# Altium PCB DRV8874 MOTOR DRV.PcbDoc
Units mil, origin at the board's own origin, x right, y up, seen from the top; angles counter-clockwise.
Board outline 1397.64 x 3157.48 mil, 2 copper layers (Top Layer, Bottom Layer); 34 components, 32 nets, 112 pads, 78 vias.
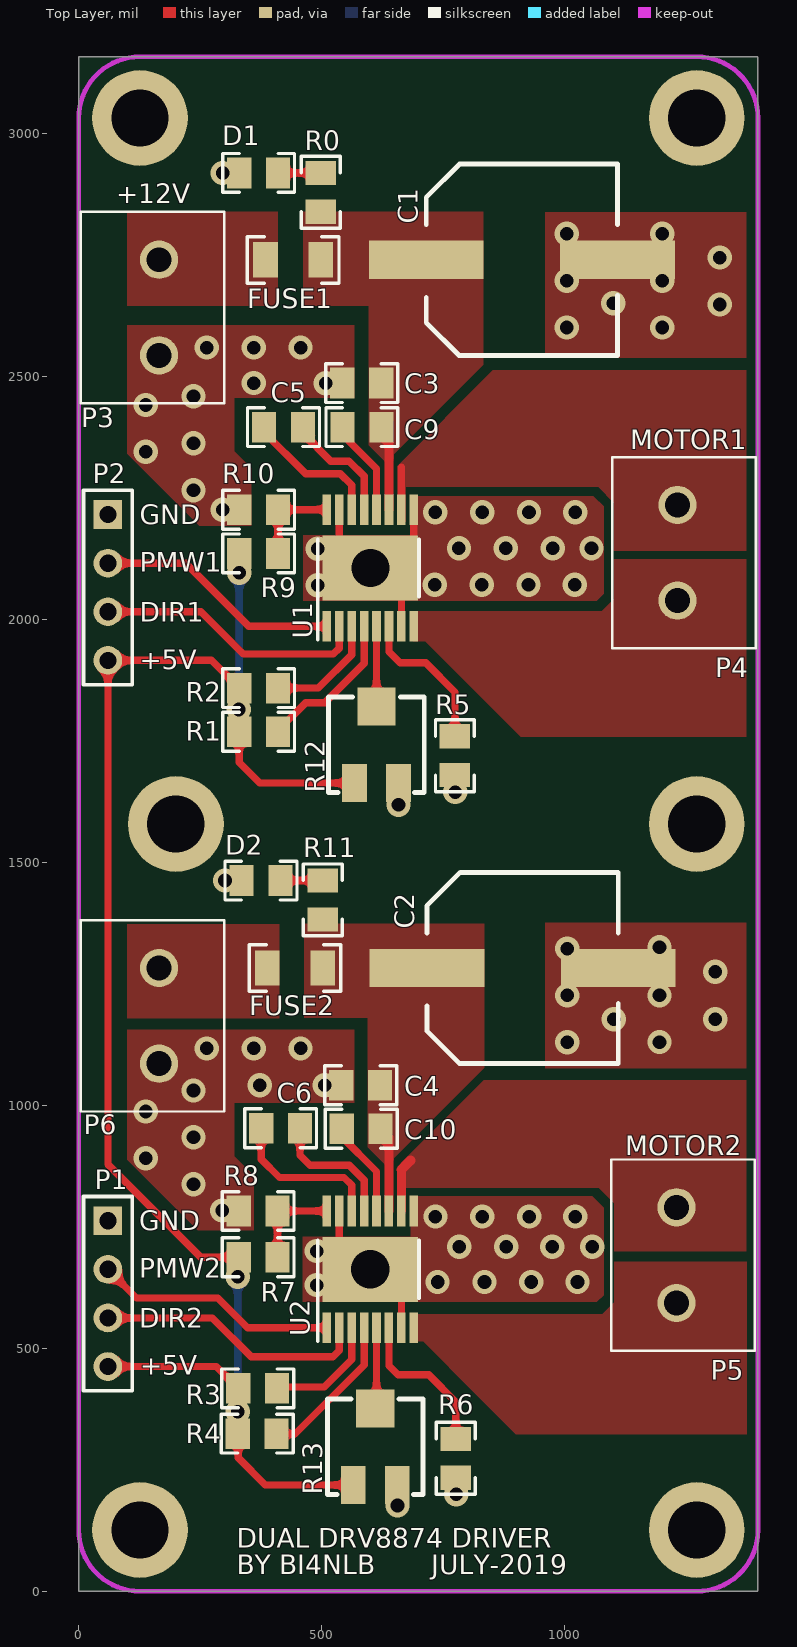
[diagram p0: Top Layer view]
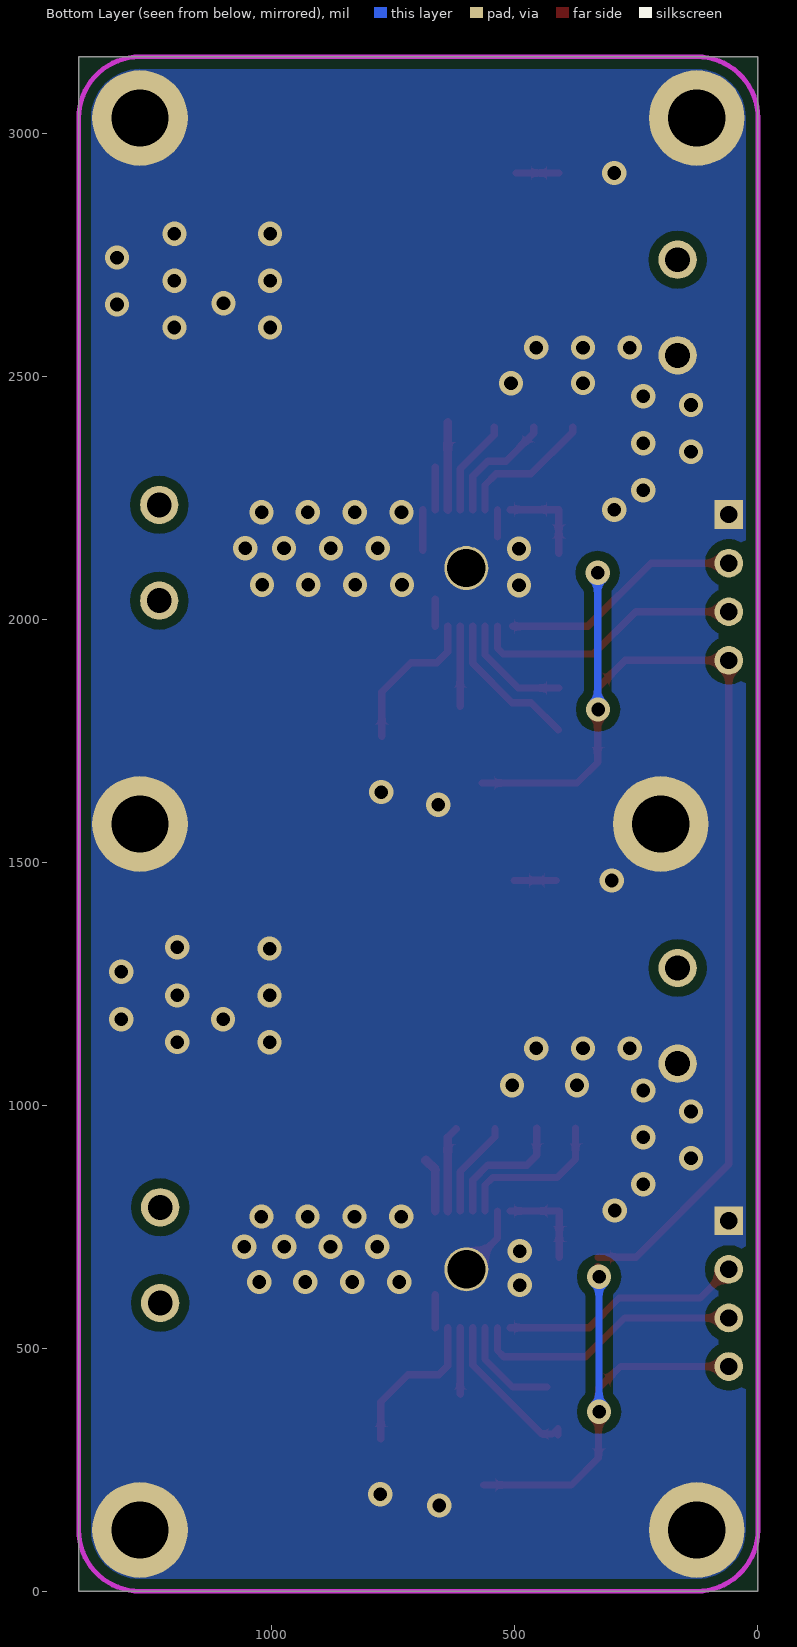
[diagram p1: Bottom Layer view, seen from below]

## Layer stack, top to bottom
Top Solder: solder mask 0.4, Solder Resist, Dk 3.5
Top Layer: signal copper 1.4
Dielectric 1: dielectric 12.6, FR-4, Dk 4.8
Bottom Layer: signal copper 1.4
Bottom Solder: solder mask 0.4, Solder Resist, Dk 3.5

## Board outline
0,0 0,3157.48 1397.64,3157.48 1397.64,0 0,0

## Design rules (kind name [scope] priority, off if disabled: settings)
Clearance [All] p1: gap=20 ignorepadtopadclearanceinfootprint=FALSE
ComponentClearance [All] p1: gap=0 collisioncheckmode=3 verticalgap=0 showdistances=FALSE
Height [All] p1: minheight=0 maxheight=3937.01 prefheight=500
HoleSize [All] p1: absolutevalues=TRUE maxlimit=200 minlimit=1 maxpercent=80.000 minpercent=20.000
HoleToHoleClearance [All] p1: gap=0 allowstackedmicrovias=TRUE
MinimumSolderMaskSliver [All] p1: minsoldermaskwidth=0
PlaneClearance [All] p1: clearance=0
PlaneConnect [All] p1: planeconnectstyle=Direct reliefexpansion=100 reliefentries=4 reliefconductorwidth=100 reliefairgap=0
PolygonConnect [All] p1: connectstyle=Direct reliefconductorwidth=100 reliefentries=4 polygonreliefangle="90 Angle" airgapwidth=0
RoutingVias [All] p1: holewidth=28 width=50 viastyle="Through Hole" minholewidth=10 minwidth=20 maxholewidth=28 maxwidth=50
SilkToSilkClearance [All] p1: silktosilkclearance=0
SilkToSolderMaskClearance [IsPad] p1: minsilkscreentomaskgap=0 clearancetoexposedcopper=TRUE
SolderMaskExpansion [All] p1: expansion=4
Width [All] p1: maxlimit=100 minlimit=10 preferedwidth=10 minimp=50.000000 maximp=50.000000 favimp=50.000000
21 further rules are at their usual default settings.

## Components (designator, comment, footprint, x,y, rotation, side; value= is the part's Value field where it differs from the comment)
C1 "470uF" CAP 1108.7,2936.73 r270 top
C2 "470uF" CAP 1110,1479.28 r270 top
C3 "08051C103JAT2A" 0805_HV 582.23,2486.04 r180 top value=0.01uF
C4 "08051C103JAT2A" 0805_HV 580,1041.43 r180 top value=0.01uF
C5 "08051C103JAT2A" 0805_HV 421.31,2395.43 r0 top value=0.01uF
C6 "08051C103JAT2A" 0805_HV 415.32,952.43 r0 top value=0.01uF
C9 "08051C103JAT2A" 0805_HV 582.8,2395.43 r180 top value=0.01uF
C10 "08051C103JAT2A" 0805_HV 581,951.43 r180 top value=0.01uF
D1 "RED" 0805_HV 370,2918.31 r180 top
D2 "RED" 0805_HV 375,1462.43 r180 top
FUSE1 "" 1206 441,2739.43 r0 top
FUSE2 "" 1206 445,1282.43 r0 top
P1 "Header 4" HDR1X4 60,762.43 r270 top
P2 "Header 4" HDR1X4 60,2215.43 r270 top
P3 "Used in BOM report" 2p 3.94,2838.31 r270 top
P4 "Header 2" 2p 1393.42,1940.01 r90 top
P5 "Header 2" 2p 1391.42,494.72 r90 top
P6 "Used in BOM report" 2p 3.94,1380.86 r270 top
R0 "CRCW080510K0FKEA" 0805_HV 498.09,2878.31 r90 top value=10.0k
R1 "CRCW080510K0FKEA" 0805_HV 370,1768.43 r180 top value=10.0k
R2 "CRCW080510K0FKEA" 0805_HV 370,1858.43 r180 top value=10.0k
R3 "CRCW080510K0FKEA" 0805_HV 368,417.43 r180 top value=10.0k
R4 "CRCW080510K0FKEA" 0805_HV 367,324.43 r180 top value=10.0k
R5 "CRCW080510K0FKEA" 0805_HV 774,1719.43 r270 top value=10.0k
R6 "CRCW080510K0FKEA" 0805_HV 776,273.43 r270 top value=10.0k
R7 "CRCW080510K0FKEA" 0805_HV 369,687.43 r180 top value=10.0k
R8 "CRCW080510K0FKEA" 0805_HV 369,782.43 r180 top value=10.0k
R9 "CRCW080510K0FKEA" 0805_HV 370,2135.43 r0 top value=10.0k
R10 "CRCW080510K0FKEA" 0805_HV 370,2225.43 r180 top value=10.0k
R11 "CRCW080510K0FKEA" 0805_HV 502.09,1422.43 r90 top value=10.0k
R12 "50K" POT4MM-2 612.5,1741.69 r90 top
R13 "50K" POT4MM-2 610,297.43 r90 top
U1 "DRV8874PWPR" PWP0016J_M 600,2105.43 r90 top value=Value
U2 "DRV8874PWPR" PWP0016J_M 599.9,662.43 r90 top value=Value

## Footprints (in the part's own frame and the unit in brackets; to place one, negate y for a bottom-side part, rotate by r counter-clockwise, add the part's x,y. Pads: shape width x height; smd on the part's side, far side on the other; paste and mask are expansions set on the pad)
2p [mm]
  round 2 hole 1.3: 1(2.5,4.1) 2(7.5,4.1)
  silkscreen extent 0,0 10,7.5
0805_HV [mil] "0805 with 30mil clearance between pads"
  rect 50x63 smd: 1(-40,0) 2(40,0)
  silkscreen extent -74,-40 74,40, body extent -43,-29 43,29, height 57
1206 [mm] "1206 from SM-752 data"
  rect 1.3x1.85 smd: 1(-1.45,0) 2(1.45,0)
  silkscreen extent -2.4,-1.21 2.4,1.21, body extent -1.7,-0.9 1.7,0.9, height 1.35
CAP [mm]
  rect 2x6 smd: 1(5,0) 2(5,-10)
  silkscreen extent 0,-10 10,0
HDR1X4 [mm] "Connector; Header; 4 Position"
  rect 1.5x1.5 hole 0.9: 1(0,0)
  round 1.5 hole 0.9: 2(2.54,0) 3(5.08,0) 4(7.62,0)
  silkscreen extent -1.27,-1.27 8.89,1.27
POT4MM-2 [mm] "Square Trimming Potentiometer"
  rect 2x1.3 smd: CCW(-2,-1.15) CW(-2,1.15)
  rect 2x2 smd: W(2,0)
  silkscreen extent -2.5,-2.5 2.5,2.5
PWP0016J_M [mm]
  rect 1.6x0.45 smd paste+0 mask+0.051: 1(-3.05,2.275) 2(-3.05,1.625) 3(-3.05,0.975) 4(-3.05,0.325) 5(-3.05,-0.325) 6(-3.05,-0.975) 7(-3.05,-1.625) 8(-3.05,-2.275) 9(3.05,-2.275) 10(3.05,-1.625) 11(3.05,-0.975) 12(3.05,-0.325) 13(3.05,0.325) 14(3.05,0.975) 15(3.05,1.625) 16(3.05,2.275)
  rect 3.4x5 smd paste-1.7 mask-1.702: 17(0,0)
  silkscreen extent -3.75,-2.55 1.5,2.75, body extent 0,0 0.25,0.25, height 0.25

## Part data
C1 C2: library part Cap_100uF, Alternate Manufacturer=-, Manufacturer="Used in BOM report", Alternate PartNumber=-, ComponentLink1Description="Datasheet Link", CompType="Used in some BOM reports.  Useful for finding later.", MountType="SMT, TH, or N/A", PackageReference="eg:  0603, used in PnP report", PartNumber="Used in BOM report", RoHS="Used in BOM report.  Use Y or N."
C3 C4 C9 C10: "CAP, CERM, 0.01 礔, 100 V, +/- 5%, X7R, 0805", Cap_Case=0805, Manufacturer=AVX, Supplier Part Number 1=478-3745-1-ND, TempCo=X7R, Tolerance_%=5, Value1="0.078 ohm", Value2=100V, ValueDisplayed=0.1礔, AEC Category=Q200, AEC Grade=N/A, AEC Qualified=N, Cap_F=0.00000001, ComponentLink1Description="Datasheet link", ComponentLink1URL=http://datasheets.avx.com/X7RDielectric.pdf, CompType=Capacitor, ESR_ohm=0.078, LatestRevisionDate=2016-08-09, MountType=SMT, PackageReference=0805, PartNumber=08051C103JAT2A, Polarized=N, Published=2008-06-19, Publisher="Texas Instruments", RoHS=Y, SizeArea_mm2=2.5, SizeAreaWB_mm2=6.75, SizeX_mm=2, SizeY_mm=1.25, SizeZ_mm=1.45, Supplier 1=Digi-Key, Supplier 2=Mouser, Supplier 3=Farnell, Supplier Part Number 2=581-08051C103J, Supplier Part Number 3=1396066, SymbolVersion=2008-07-09, TaMax_C=125, TaMin_C=-55, Technology=Ceramic, U/M=EA, VDC_V=100
C5: "CAP, CERM, 0.01 礔, 100 V, +/- 5%, X7R, 0805", Cap_Case=0805, Manufacturer=AVX, Supplier Part Number 1=478-3745-1-ND, TempCo=X7R, Tolerance_%=5, Value1="0.078 ohm", Value2=100V, ValueDisplayed=0.022礔, AEC Category=Q200, AEC Grade=N/A, AEC Qualified=N, Cap_F=0.00000001, ComponentLink1Description="Datasheet link", ComponentLink1URL=http://datasheets.avx.com/X7RDielectric.pdf, CompType=Capacitor, ESR_ohm=0.078, LatestRevisionDate=2016-08-09, MountType=SMT, PackageReference=0805, PartNumber=08051C103JAT2A, Polarized=N, Published=2008-06-19, Publisher="Texas Instruments", RoHS=Y, SizeArea_mm2=2.5, SizeAreaWB_mm2=6.75, SizeX_mm=2, SizeY_mm=1.25, SizeZ_mm=1.45, Supplier 1=Digi-Key, Supplier 2=Mouser, Supplier 3=Farnell, Supplier Part Number 2=581-08051C103J, Supplier Part Number 3=1396066, SymbolVersion=2008-07-09, TaMax_C=125, TaMin_C=-55, Technology=Ceramic, U/M=EA, VDC_V=100
C6: "CAP, CERM, 0.01 礔, 100 V, +/- 5%, X7R, 0805", Cap_Case=0805, Manufacturer=AVX, Supplier Part Number 1=478-3745-1-ND, TempCo=X7R, Tolerance_%=5, Value1="0.078 ohm", Value2=100V, ValueDisplayed=0.01礔, AEC Category=Q200, AEC Grade=N/A, AEC Qualified=N, Cap_F=0.00000001, ComponentLink1Description="Datasheet link", ComponentLink1URL=http://datasheets.avx.com/X7RDielectric.pdf, CompType=Capacitor, ESR_ohm=0.078, LatestRevisionDate=2016-08-09, MountType=SMT, PackageReference=0805, PartNumber=08051C103JAT2A, Polarized=N, Published=2008-06-19, Publisher="Texas Instruments", RoHS=Y, SizeArea_mm2=2.5, SizeAreaWB_mm2=6.75, SizeX_mm=2, SizeY_mm=1.25, SizeZ_mm=1.45, Supplier 1=Digi-Key, Supplier 2=Mouser, Supplier 3=Farnell, Supplier Part Number 2=581-08051C103J, Supplier Part Number 3=1396066, SymbolVersion=2008-07-09, TaMax_C=125, TaMin_C=-55, Technology=Ceramic, U/M=EA, VDC_V=100
D1 D2: library part LED, "LED发光管"
FUSE1 FUSE2: library part R, "电阻"
P1 P2: "Header, 4-Pin", LatestRevisionDate=17-Jul-2002, LatestRevisionNote="Re-released for DXP Platform.", Publisher="Altium Limited"
P3 P6: library part PWR5.5, Alternate Manufacturer=-, Alternate PartNumber=-, ComponentLink1Description="Datasheet Link", CompType="Used in some BOM reports.  Useful for finding later.", Manufacturer="Used in BOM report", MountType="SMT, TH, or N/A", PackageReference="eg:  0603, used in PnP report", PartNumber="Used in BOM report", RoHS="Used in BOM report.  Use Y or N."
P4 P5: "Header, 2-Pin", LatestRevisionDate=17-Jul-2002, LatestRevisionNote="Re-released for DXP Platform.", Publisher="Altium Limited"
R0 R11: "RES, 10.0 k, 1%, 0.125 W, 0805", Manufacturer=Vishay-Dale, Power_W=0.125, Supplier Part Number 1=541-10.0KCCT-ND, TempCo="100 ppm/C", Tolerance_%=1, Value1=1%, Value2=0.125W, Value_Code=10k0, ValueDisplayed=10.0k, AEC Category=Q200, AEC Qualified=?, ComponentLink1Description="Datasheet link", ComponentLink1URL=http://www.vishay.com/docs/20035/dcrcwe3.pdf, CompType=Resistor, EIA_Code=E96, LatestRevisionDate=2016-08-02, MountType=SMT, PackageReference=0805, PartNumber=CRCW080510K0FKEA, Published=2008-06-26, Publisher="Texas Instruments", Res_ohm=10000, RoHS=Y, SizeArea_mm2=2.5, SizeX_mm=2, SizeY_mm=1.25, SizeZ_mm=1.45, Supplier 1=Digi-Key, Supplier 2=Mouser, Supplier 3=Farnell, Supplier Part Number 2=71-CRCW0805-10K-E3, Supplier Part Number 3=1469856, SymbolVersion=2009-05-29, Technology="Thick Film", U/M=EA, VDC_V=150
R1 R2 R3 R4: "RES, 10.0 k, 1%, 0.125 W, 0805", Manufacturer=Vishay-Dale, Power_W=0.125, Supplier Part Number 1=541-10.0KCCT-ND, TempCo="100 ppm/C", Tolerance_%=1, Value1=1%, Value2=0.125W, Value_Code=10k0, ValueDisplayed=10k, AEC Category=Q200, AEC Qualified=?, ComponentLink1Description="Datasheet link", ComponentLink1URL=http://www.vishay.com/docs/20035/dcrcwe3.pdf, CompType=Resistor, EIA_Code=E96, LatestRevisionDate=2016-08-02, MountType=SMT, PackageReference=0805, PartNumber=CRCW080510K0FKEA, Published=2008-06-26, Publisher="Texas Instruments", Res_ohm=10000, RoHS=Y, SizeArea_mm2=2.5, SizeX_mm=2, SizeY_mm=1.25, SizeZ_mm=1.45, Supplier 1=Digi-Key, Supplier 2=Mouser, Supplier 3=Farnell, Supplier Part Number 2=71-CRCW0805-10K-E3, Supplier Part Number 3=1469856, SymbolVersion=2009-05-29, Technology="Thick Film", U/M=EA, VDC_V=150
R5 R6: "RES, 10.0 k, 1%, 0.125 W, 0805", Manufacturer=Vishay-Dale, Power_W=0.125, Supplier Part Number 1=541-10.0KCCT-ND, TempCo="100 ppm/C", Tolerance_%=1, Value1=1%, Value2=0.125W, Value_Code=10k0, ValueDisplayed=1.5k, AEC Category=Q200, AEC Qualified=?, ComponentLink1Description="Datasheet link", ComponentLink1URL=http://www.vishay.com/docs/20035/dcrcwe3.pdf, CompType=Resistor, EIA_Code=E96, LatestRevisionDate=2016-08-02, MountType=SMT, PackageReference=0805, PartNumber=CRCW080510K0FKEA, Published=2008-06-26, Publisher="Texas Instruments", Res_ohm=10000, RoHS=Y, SizeArea_mm2=2.5, SizeX_mm=2, SizeY_mm=1.25, SizeZ_mm=1.45, Supplier 1=Digi-Key, Supplier 2=Mouser, Supplier 3=Farnell, Supplier Part Number 2=71-CRCW0805-10K-E3, Supplier Part Number 3=1469856, SymbolVersion=2009-05-29, Technology="Thick Film", U/M=EA, VDC_V=150
R7 R8 R9 R10: "RES, 10.0 k, 1%, 0.125 W, 0805", Manufacturer=Vishay-Dale, Power_W=0.125, Supplier Part Number 1=541-10.0KCCT-ND, TempCo="100 ppm/C", Tolerance_%=1, Value1=1%, Value2=0.125W, Value_Code=10k0, ValueDisplayed=0, AEC Category=Q200, AEC Qualified=?, ComponentLink1Description="Datasheet link", ComponentLink1URL=http://www.vishay.com/docs/20035/dcrcwe3.pdf, CompType=Resistor, EIA_Code=E96, LatestRevisionDate=2016-08-02, MountType=SMT, PackageReference=0805, PartNumber=CRCW080510K0FKEA, Published=2008-06-26, Publisher="Texas Instruments", Res_ohm=10000, RoHS=Y, SizeArea_mm2=2.5, SizeX_mm=2, SizeY_mm=1.25, SizeZ_mm=1.45, Supplier 1=Digi-Key, Supplier 2=Mouser, Supplier 3=Farnell, Supplier Part Number 2=71-CRCW0805-10K-E3, Supplier Part Number 3=1469856, SymbolVersion=2009-05-29, Technology="Thick Film", U/M=EA, VDC_V=150
R12 R13: library part "RPot SM", "Square Trimming Potentiometer", ComponentLink1Description="Manufacturer Link", ComponentLink1URL=http://bourns.com/2/search.html, DatasheetVersion=Oct-2003, PackageDescription="Square Trimming Potentiometer", PackageReference=POT4MM-2, Published=17-Dec-2003, Publisher="Altium Limited"
U1 U2: "Imported", Manufacturer="Texas Instruments", PartNumber=DRV8874PWPR, RefDes=RefDes, TYPE=TYPE

## Free pads (board coordinates)
  round 196.85 hole 118.11: 1(125.98,3031.5) 1(125.98,125.98) 1(200,1578.74) 1(1271.65,125.98) 1(1271.65,1578.74) 1(1271.65,3031.5)
  round 90.55 hole 78.74: 1(600,662.43) 1(600.1,2105.43)

## Via types
v1: diameter 50, hole 28, Top Layer to Bottom Layer, 78 vias

## Nets (pads, with @x,y where several pads share a name; then routed paths per layer and width w, separated by ;. In a path a pad name is that pad's centre, name@x,y a point inside that pad or via, vN(x,y) a via of type N, cw(c..) or ccw(c..) an arc to the next point about the centre after c; other vN are vias at no path point)
+5V: P1.4 P2.4 R1.2 R2.2 R3.2 R4.2 R7.2 R9.1 R12.CW R13.CW | length 3360.2
  Top Layer w15: P1.4 283,462.43 R3.2 328,274.43 383.74,218.69 R13.CW ; v1(327,647.43) 327,654.43 331,658.43 326,663.43 R7.2@330,667.43 ; R7.2 251,687.43 60,878.43 P2.4 273,1915.43 R2.2 R1.2 330,1705.43 372.48,1662.95 R12.CW
  Bottom Layer w15: v1@326,645.43 327,644.43 v1(327,369.43) ; v1(327,647.43) v1@328,647.43 ; v1(329,1814.43) 330,1815.43 v1(330,2095.43)
+12V: C1.2 C3.1 C9.1 FUSE1.2 R0.1 U1.11 | length 179.5
  Top Layer w18: U1.11 C9.1@638.39,2405
+12V_1: C2.2 C4.1 C10.1 FUSE2.2 R11.1 U2.11 | length 176.1
  Top Layer w15: C10.1 C10.1@638.39,934.05
  Top Layer w18: U2.11@638.39,782.51 C10.1@638.39,934.05
DIR1: P2.3 U1.2 | length 561.8
  Top Layer w15: P2.3 251.74,2015.43 338.66,1928.51 524,1928.51 536.02,1940.54 U1.2
DIR2: P1.3 U2.2 | length 561.5
  Top Layer w15: P1.3 274.74,562.43 354.74,482.43 523,482.43 536.02,495.46 U2.2@536.02,542.35
GND: C1.1 C2.1 C3.2 C4.2 D1.2 D2.2 P1.1 P2.1 P3.2 P6.2 pad.1 R5.2 R6.2 R8.2 R10.2 R12.CCW R13.CCW U1.7 U1.9 U1.15 U1.17 U2.7 U2.9 U2.15 U2.17 | length 410.7
  Top Layer w15: U2.15@536.02,782.51 536.02,726.41 U2.17@600,662.43 ; U1.17@536.02,2169.41 U1.15 ; U2.7@663.98,542.35 U2.17@663.98,610.24 ; U1.7 U1.17@663.98,2041.46 ; U1.17@689.57,2141.43 U1.9
  other v1: 656,176.43 777,199.43 490,630 738.39,636.3 834.83,636.3 931.26,636.3 1026.24,636.3 490,700 783.12,708.66 879.55,708.66 974.53,708.66 1056.85,708.66 733.88,770.93 830.32,770.93 926.76,770.93 1021.73,770.93 295,783.43 236.22,837.61 137.8,890.72 236.22,934.05 137.8,987.16 236.22,1030.49 372.48,1041.43 506,1041.43 263.56,1116.93 360,1116.93 456.44,1116.93 1005,1129.56 1195,1130 1100.64,1176.9 1310,1176.9 1005,1226 1195,1226 1310,1275 1005,1322.43 1195,1325 301,1462.43 658,1618.43 775,1644.43 491.73,2070 732.57,2071.06 829,2071.06 925.44,2071.06 1020.42,2071.06 491.73,2145 1055,2146 782.32,2146.06 878.76,2146.06 975.2,2146.06 733.57,2220.06 830,2220.06 926.44,2220.06 1021.42,2220.06 296,2225.43 236.22,2265.77 137.8,2344.51 236.22,2362.2 137.8,2440.94 236.22,2458.64 508.23,2485.43 360,2486.04 263.56,2559.06 360,2559.06 456.44,2559.06 1003.94,2600.41 1200.79,2600.41 1318.9,2647.76 1099.68,2650.29 1003.94,2696.85 1200.79,2696.85 1318.9,2744.19 1003.94,2793.29 1200.79,2793.29 296,2918.31
NetC5_1: C5.1 U1.14 | length 286.3
  Top Layer w15: C5.1 381.31,2385.12 467,2299.43 538.26,2299.43 561.61,2276.08 U1.14
NetC5_2: C5.2 U1.13 | length 244.1
  Top Layer w15: C5.2 461.31,2382.56 518.43,2325.43 556,2325.43 587.2,2294.23 U1.13
NetC6_1: C6.1 U2.14 | length 325
  Top Layer w15: C6.1 375.31,889.12 413,851.43 546,851.43 561.61,835.82 U2.14@561.61,782.51
NetC6_2: C6.2 U2.13 | length 271.6
  Top Layer w15: C6.2 455.31,897.12 476,876.43 556.36,876.43 587.2,845.58 U2.13@587.2,782.51
NetC9_2: C9.2 U1.12 | length 198.9
  Top Layer w15: C9.2 542.8,2379.64 612.8,2309.64 U1.12
NetC10_2: C10.2 U2.12 | length 198.7
  Top Layer w15: C10.2 541,935.43 612.8,863.64 U2.12@612.8,782.51
NetD1_1: D1.1 R0.2 | length 88.1
  Top Layer w15: D1.1 R0.2
NetD2_1: D2.1 R11.2 | length 87.1
  Top Layer w15: D2.1 R11.2
NetFUSE1_1: FUSE1.1 P3.1
NetFUSE2_1: FUSE2.1 P6.1
NetR1_1: R1.1 U1.4 | length 308.9
  Top Layer w15: R1.1@411,1772.43 467,1828.43 506.23,1828.43 587.2,1909.4 U1.4
NetR2_1: R2.1 U1.3 | length 238.3
  Top Layer w15: R2.1 493,1858.43 561.61,1927.05 U1.3
NetR3_1: R3.1 U2.3 | length 216.4
  Top Layer w15: 434,420.43 505,420.43 561.61,477.05 U2.3@561.61,542.35
NetR4_1: R4.1 U2.4 | length 329.5
  Top Layer w15: R4.1@411.31,321.43 411.31,334.74 422.62,323.43 445,323.43 587.2,465.64 U2.4@587.2,542.35
NetR5_1: R5.1 U1.6 | length 313.1
  Top Layer w15: U1.6 638.39,1933.05 661,1910.43 714,1910.43 774,1850.43 R5.1
NetR6_1: R6.1 U2.6 | length 322.8
  Top Layer w15: U2.6@638.39,542.35 638.39,464.05 657,445.43 720,445.43 776,389.43 R6.1
NetR7_1: R7.1 R8.1 U2.16 | length 195.7
  Top Layer w15: R7.1 R8.1 509.59,782.43 U2.16@509.67,782.51
NetR9_2: R9.2 R10.1 U1.16 | length 190.5
  Top Layer w15: R9.2 R10.1 410.08,2225.51 U1.16
OUT1_1: P4.1 U1.8
OUT1_2: P4.2 U1.10 | length 87.2
  Top Layer w15: U1.10 663.98,2312.7
OUT2_1: P5.1 U2.8
OUT2_2: P5.2 U2.10 | length 111.8
  Top Layer w18: U2.10@663.98,782.51 663.98,867.46
  Top Layer w20: 663.98,867.46 683,886.48
PWM1: P2.2 U1.1 | length 498.5
  Top Layer w15: P2.2 220,2115.43 350.08,1985.35 U1.1@504.67,1985.35
PWM2: P1.2 U2.1 | length 499.4
  Top Layer w15: P1.2 119,603.43 286,603.43 347.08,542.35 U2.1@509.67,542.35
VREF1: R12.W U1.5 | length 165
  Top Layer w15: R12.W 612.8,1820.73 U1.5
VREF2: R13.W U2.5 | length 137.5
  Top Layer w15: R13.W@612,405.17 612.8,405.97 U2.5@612.8,542.35

## Polygon pours and split planes (outlines as drawn)
GND on Bottom Layer "GND_L02_P041" (solid, remove dead copper, pour order 41): 1397.64,0 1397.64,3157.48 0,3157.48 0,0
no net on Bottom Layer "NONET_L02_P040" (solid, remove dead copper, pour order 40): 3903.01,571.52
GND on Top Layer "GND_L01_P078" (solid, remove dead copper, pour order 78): 100,2605.43 100,2340.83 248.39,2192.43 355,2192.43 355,2310.43 320,2345.43 320,2455.43 567.22,2455.43 567.22,2605.43
GND on Top Layer "GND_L01_P076" (solid, remove dead copper, pour order 76): 100,1155.43 100,887.83 245.39,742.43 360,742.43 360,855.43 320,895.43 320,1005.43 567.22,1005.43 567.22,1155.43
no net on Top Layer "NONET_L01_P074" (solid, remove dead copper, pour order 74): 98,1165.43
no net on Top Layer "NONET_L01_P072" (solid, remove dead copper, pour order 72): 98,1165.43
GND on Top Layer "GND_L01_P070" (solid, remove dead copper, pour order 70): 960,1375.43 960,1076.56 1373.12,1076.56 1373.12,1375.43
GND on Top Layer "GND_L01_P068" (solid, remove dead copper, pour order 68): 960,2837.31 960,2538.43 1373,2538.43 1373,2837.31
+12V_1 on Top Layer "+12V_1_L01_P066" (solid, remove dead copper, pour order 66): 464,1373.43 464,1180.56 834.12,1180.56 834.12,1373.43
NetFUSE2_1 on Top Layer "NETFUSE2_1_L01_P064" (solid, remove dead copper, pour order 64): 100,1372.31 100,1179.43 413,1179.43 413,1372.31
NetFUSE1_1 on Top Layer "NETFUSE1_1_L01_P062" (solid, remove dead copper, pour order 62): 100,2838.31 100,2645.43 409,2645.43 409,2838.31
+12V on Top Layer "+12V_L01_P060" (solid, remove dead copper, pour order 60): 461.88,2838.31 461.88,2645.43 832,2645.43 832,2838.31
no net on Top Layer "NONET_L01_P058" (solid, remove dead copper, pour order 58): 75,2865.43
OUT2_1 on Top Layer "OUT2_1_L01_P056" (solid, remove dead copper, pour order 56): 685,570.43 1077.64,570.43 1102,594.8 1102,677.8 1375,677.8 1375,323.43 899.36,323.43 815,407.8 708.36,514.43 685,514.43
OUT2_2 on Top Layer "OUT2_2_L01_P054" (solid, remove dead copper, pour order 54): 1373.64,699.36 1373.64,1051.43 833.86,1051.43 655.64,873.21 655.64,758.37 673.64,758.37 673.64,830.36 1069.64,830.36 1101.86,798.14 1101.86,699.36
GND on Top Layer "GND_L01_P052" (solid, remove dead copper, pour order 52): 461.31,729.43 683,729.43 683,812.43 1056.85,812.43 1080,789.28 1080,609.43 1066,595.43 461.31,595.43
+12V_1 on Top Layer "+12V_1_L01_P050" (solid, remove dead copper, pour order 50): 595,913.43 595,1320.43 834,1320.43 834,1077.43 648,891.43 648,752.44 628,752.44 628,880.43
GND on Top Layer "GND_L01_P048" (solid, remove dead copper, pour order 48): 461.88,2172.43 682,2172.43 682,2253.43 1058.85,2253.43 1080,2232.28 1080,2052.43 1066,2038.43 461.88,2038.43
+12V on Top Layer "+12V_L01_P046" (solid, remove dead copper, pour order 46): 597,2357.43 597,2838.31 832,2838.31 832,2523.43 648,2339.43 648,2200.44 628,2200.44 628,2326.43
OUT1_1 on Top Layer "OUT1_1_L01_P042" (solid, remove dead copper, pour order 42): 681,2016.43 1076.27,2016.43 1100.64,2040.8 1100.64,2123.8 1373.64,2123.8 1373.64,1758.43 909,1758.43 813.64,1853.8 713,1954.43 681,1954.43
OUT1_2 on Top Layer "OUT1_2_L01_P039" (solid, remove dead copper, pour order 39): 1373,2141.43 1373,2512.43 852.15,2512.43 655,2315.28 655,2200.44 673,2200.44 673,2272.43 1069,2272.43 1101.22,2240.21 1101.22,2141.43
OUT1_1 on Top Layer "OUT1_1_L01_P038" (solid, remove dead copper, pour order 38): 710,2445.43

## Keep-outs
Keep-Out Layer:
  lines w10: 0,125.98 ccw(c125.98,125.98) 125.98,0 1271.65,0 ccw(c1271.65,125.98) 1397.64,125.98 1397.64,3031.5 ccw(c1271.65,3031.5) 1271.65,3157.48 125.98,3157.48 ccw(c125.98,3031.5) 0,3031.5 0,125.98

## Silkscreen, mask and mechanical layers (free items; w line width, h text height)
Top Overlay:
  text "+12V" at 77,2856.43 h40
  text "MOTOR1" at 1135,2350 h40
  text "GND" at 125.95,2195.95 h40
  text "PMW1" at 125.67,2097.53 h40
  text "DIR1" at 125.67,1995.16 h40
  text "+5V" at 125.95,1896.74 h40
  text "MOTOR2" at 1125,897.12 h40
  text "GND" at 125,742.43 h40
  text "PMW2" at 125,645 h40
  text "DIR2" at 125,542.43 h40
  text "+5V" at 126.67,445 h40
  text "DUAL DRV8874 DRIVER" at 325,90 h40
  text "BY BI4NLB" at 325,35 h40
  text "JULY-2019" at 725,35 h40
Top Solder:
  lines w15: 663.98,2225.51 663.98,2312.7
  lines w18: 638.39,782.51 638.39,934.05 ; 638.39,2225.51 638.39,2375 ; 663.98,783.05 663.98,866.95
Mechanical 1:
  lines w10: 1270,0 125.98,0 cw(c125.98,125.98) 0,125.98 0,3031.5 cw(c125.98,3031.5) 125.98,3157.48 1271.65,3157.48 cw(c1271.65,3031.5) 1397.64,3031.5 1397.64,125.98 cw(c1271.65,125.98) 1271.65,0